# Altium PCB Copy of motherboard.PcbDoc
Units mil, origin at the board's own origin, x right, y up, seen from the top; angles counter-clockwise.
Board outline 6000 x 4000 mil, 2 copper layers (Top Layer, Bottom Layer); 46 components, 53 nets, 321 pads, 95 vias.
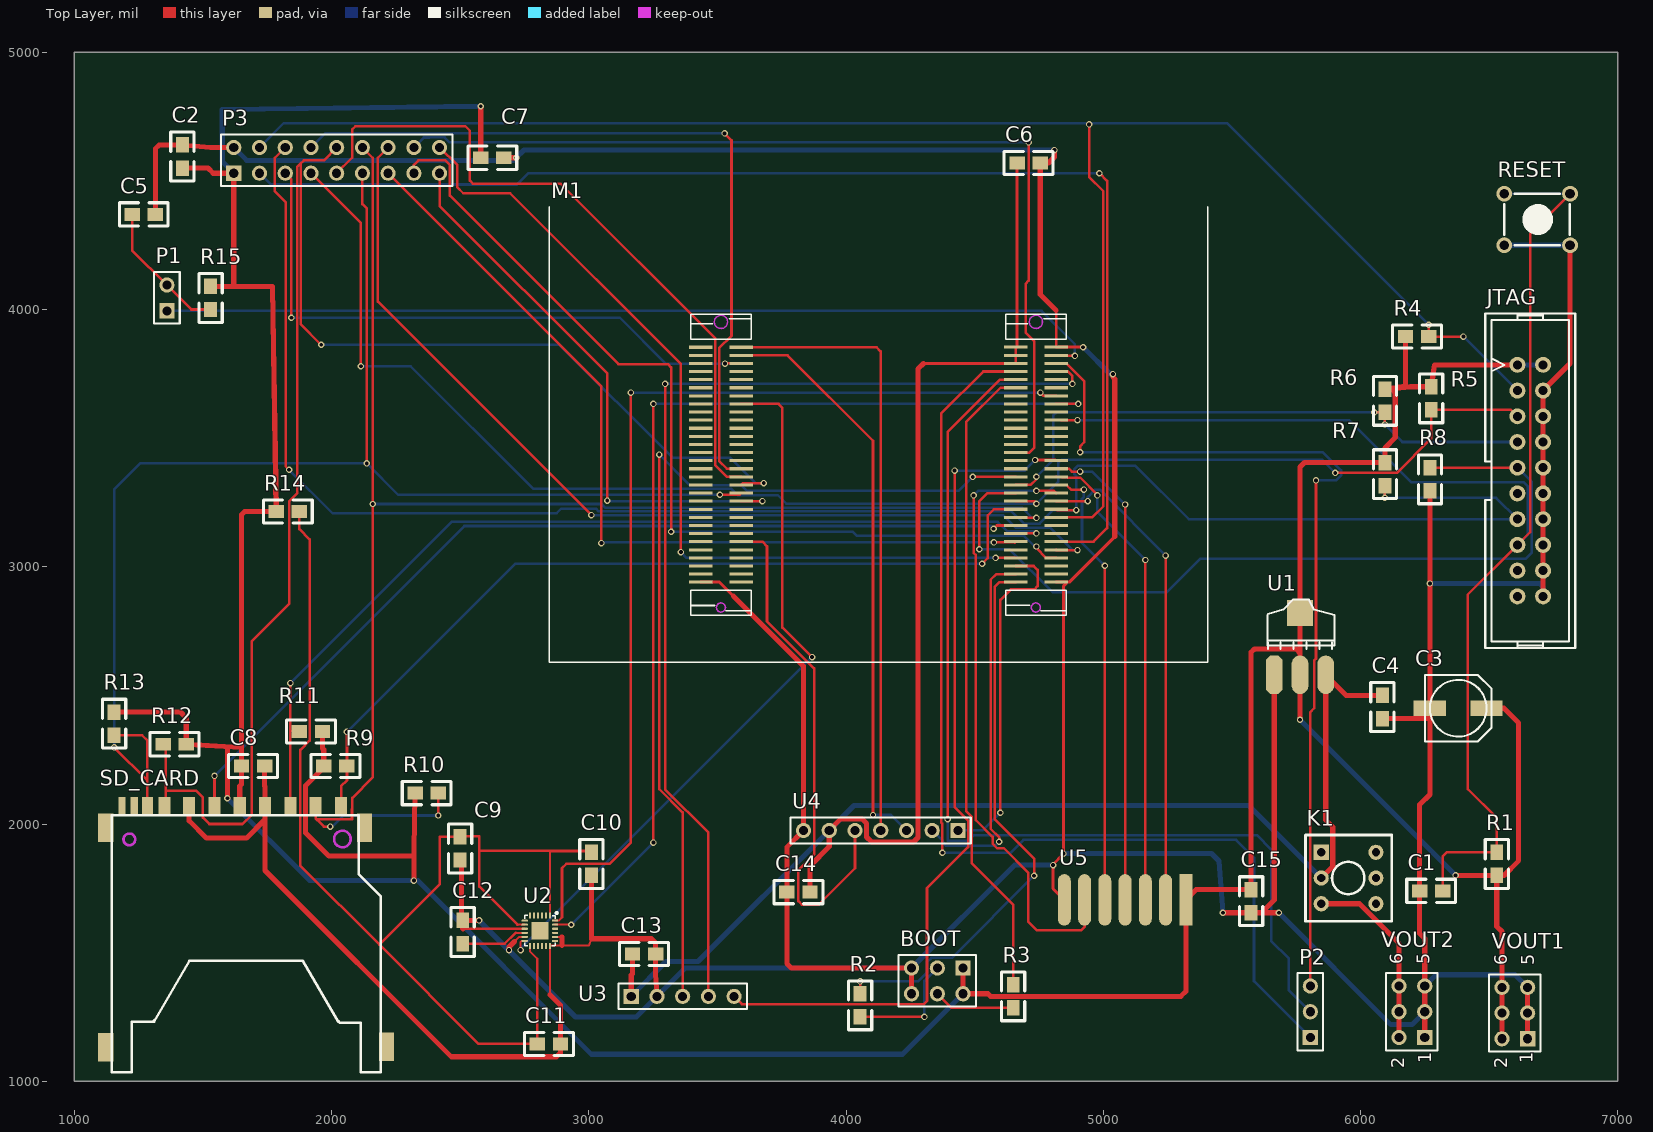
[diagram p0: Top Layer view]
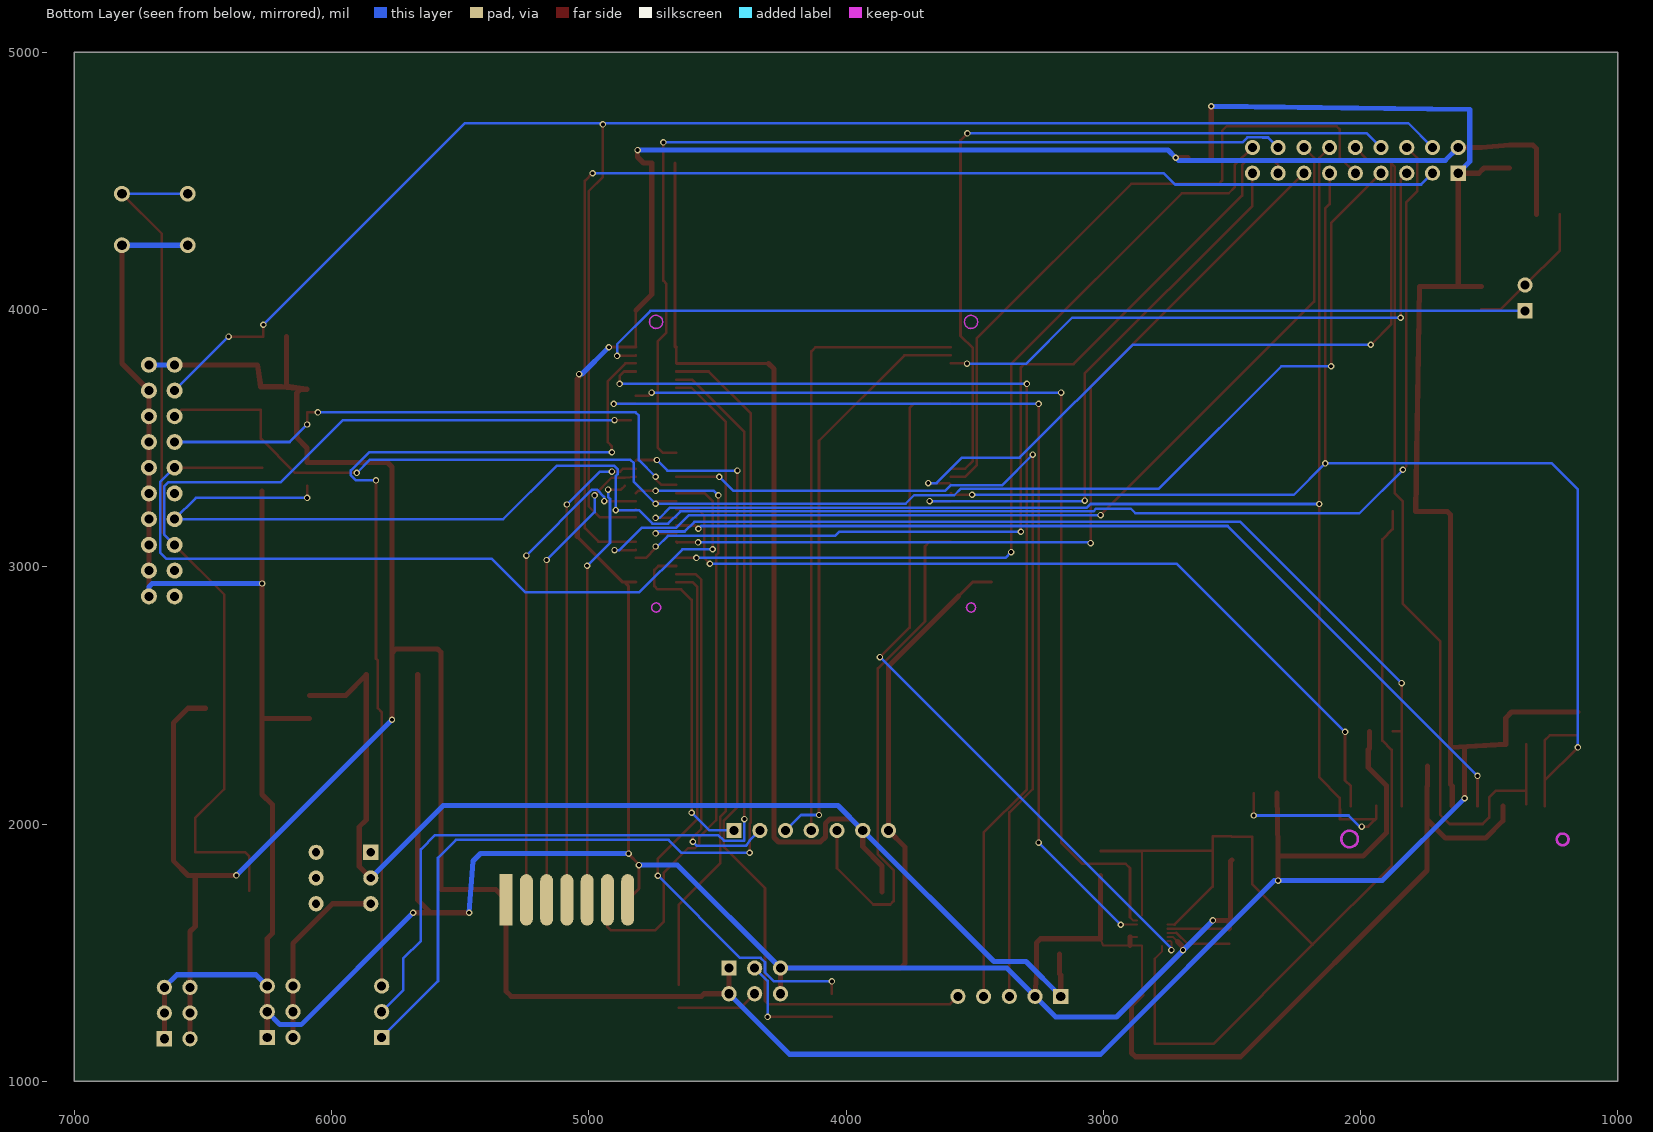
[diagram p1: Bottom Layer view, seen from below]

## Layer stack, top to bottom
Top Solder: solder mask 0.4, Solder Resist, Dk 3.5
Top Layer: signal copper 1.4
Dielectric 1: dielectric 12.6, FR-4, Dk 4.8
Bottom Layer: signal copper 1.4
Bottom Solder: solder mask 0.4, Solder Resist, Dk 3.5

## Board outline
1000,1000 7000,1000 7000,5000 1000,5000

## Design rules (kind name [scope] priority, off if disabled: settings)
Clearance Clearance_1 [All] p1: gap=5 ignorepadtopadclearanceinfootprint=TRUE except(0: Arc-Hole Track-Hole SMDPad-Hole THPad-Hole Via-Hole Fill-Hole Poly-Hole Region-Hole Text-Hole; 2: SMDPad-SMDPad)
Clearance [InNet('GND') vs InNet('VCC5')] p2: gap=10 ignorepadtopadclearanceinfootprint=TRUE
ComponentClearance [All] p1: gap=6 collisioncheckmode=3 verticalgap=10 showdistances=FALSE
HoleToHoleClearance [All] p1: gap=0 allowstackedmicrovias=TRUE
MinimumSolderMaskSliver all [All] p1: minsoldermaskwidth=10
MinimumSolderMaskSliver imu [HasFootprint('QFN24-t') vs HasFootprint('No Footprint')] p2: minsoldermaskwidth=0
ParallelSegment dcmi [InNetClass('dcmi') vs InNetClass('dcmi')] p1: limit=10000 gap=10
ParallelSegment sdio [InNetClass('sdio') vs InNetClass('sdio')] p2: limit=10000 gap=10
ParallelSegment spi [InNetClass('spi') vs InNetClass('spi')] p3: limit=10000 gap=10
PolygonConnect [All] p1: connectstyle=Relief reliefconductorwidth=10 reliefentries=4 polygonreliefangle="90 Angle" airgapwidth=10
RoutingVias [All] p1: holewidth=15 width=25 viastyle="Through Hole" minholewidth=15 minwidth=25 maxholewidth=15 maxwidth=25
SMDNeckDown [All] p1: percent=100.000
SilkToSilkClearance [All] p1: silktosilkclearance=0
SilkToSolderMaskClearance imu_silk_to_solder [IsPad vs HasFootprint('QFN24-t')] p1: minsilkscreentomaskgap=0 clearancetoexposedcopper=TRUE
SilkToSolderMaskClearance "all silk to solder" [IsPad] p2: minsilkscreentomaskgap=6 clearancetoexposedcopper=TRUE
SolderMaskExpansion [All] p1: expansion=4
Width vcc5 [InNet('VCC5')] p1: maxlimit=20 minlimit=10 preferedwidth=20 minimp=50.000000 maximp=50.000000 favimp=50.000000
Width gnd [InNet('GND')] p2: maxlimit=20 minlimit=7 preferedwidth=20 minimp=50.000000 maximp=50.000000 favimp=50.000000
Width vcc3 [InNet('VCC3.3')] p3: maxlimit=20 minlimit=10 preferedwidth=20 minimp=50.000000 maximp=50.000000 favimp=50.000000
Width vbtn [InNet('VBTN')] p4: maxlimit=20 minlimit=20 preferedwidth=20 minimp=50.000000 maximp=50.000000 favimp=50.000000
Width [All] p5: maxlimit=20 minlimit=7 preferedwidth=10 minimp=50.000000 maximp=50.000000 favimp=50.000000
25 further rules are at their usual default settings.

## Classes and differential pairs
net class spi: SPI_MISO SPI_MOSI SPI_NCS SPI_SCK
net class dcmi: DCMI_D0 DCMI_D1 DCMI_D2 DCMI_D3 DCMI_D4 DCMI_D5 DCMI_D6 DCMI_D7 DCMI_PCLK DCMI_PWDN DCMI_SCL DCMI_SDA DCMI_VSYNC DCMI_XCLK
net class sdio: SDIO_CMD SDIO_D2 SDIO_SCK
component class infra&stlink: BOOT C1 C2 C3 C4 C5 C6 C7 C8 C9 C10 C11 C12 C13 C14 C15 JTAG K1 P1 P2 P3 R1 R2 R3 R4 R5 R6 R7 R8 R9 R10 R11 R12 R13 R14 R15 RESET SD_CARD U1 U3 U4 VOUT1 VOUT2

## Components (designator, comment, footprint, x,y, rotation, side; value= is the part's Value field where it differs from the comment)
BOOT "BOOT" HDR2X3 4455,1440 r180 top
C1 "104" 0805 6320,1740 r180 top
C2 "104" 0805 1420.06,4640 r270 top
C3 "220uF" CC6.56.5 6380,2450 r180 top
C4 "104" 0805 6085.06,2500 r270 top
C5 "6pF" 0805 1315,4370 r180 top
C6 "104" 0805 4755,4569.94 r180 top
C7 "104" 0805 2580,4590.06 r0 top
C8 "104" 0805 1740,2224.94 r180 top
C9 "104" 0805 2499.94,1860 r90 top
C10 "104" 0805 3009.94,1800 r90 top
C11 "104" 0805 2890,1145 r180 top
C12 "104" 0805 2510,1625 r270 top
C13 "104" 0805 3260,1494.94 r180 top
C14 "104" 0805 3770,1735.06 r0 top
C15 "104" 0805 5575.06,1745 r270 top
JTAG "JTAG" JTAG_20 6660,3335 r270 top
K1 "BUTTON" BTN8.5*8.5 5847.4,1890 r0 top
M1 "STM32F4&F7_CB" STM32F4&F7_CB 4817,3853.46 r180 top
P1 "VREF_SEL" HDR1X2 1360,3995 r90 top
P2 "PWM" HDR1X3 5805,1170 r90 top
P3 "OV5640" HDR2X9 1620,4530 r0 top
R1 "0R" 0805 6530,1890 r270 top
R2 "10K" 0805 4055.06,1340 r270 top
R3 "10K" 0805 4649.94,1285 r90 top
R4 "10K" 0805 6175,3895.06 r0 top
R5 "10K" 0805 6275.06,3700 r270 top
R6 "10K" 0805 6095,3690 r270 top
R7 "10K" 0805 6095.06,3405 r270 top
R8 "10K" 0805 6269.94,3295 r90 top
R9 "47K" 0805 2060,2224.94 r180 top
R10 "47K" 0805 2415,2119.94 r180 top
R11 "47K" 0805 1875,2360 r0 top
R12 "47K" 0805 1345,2310.06 r0 top
R13 "47K" 0805 1154.94,2345 r90 top
R14 "10R" 0805 1875,3215 r180 top
R15 "10R" 0805 1530,4000 r90 top
RESET "KEY_M" KEY_M 6559.09,4450 r0 top
SD_CARD "sd card" SDCARD_L 1938,2070 r0 top
U1 "AMS1117-3.3" AMS1117 5664.97,2580.06 r0 top
U2 "MPU9250" QFN24-t 2849.5,1644 r270 top
U3 "GPS" HDR1X5 3165,1330 r0 top
U4 "AS61-T17" HDR1X7 4435,1975 r180 top
U5 "NA" "Edge Connector7" 5321.22,1705 r180 top
VOUT1 "VCC3.3" HDR2X3 6650,1165 r90 top
VOUT2 "VCC5" HDR2X3 6250,1170 r90 top

## Footprints (in the part's own frame and the unit in brackets; to place one, negate y for a bottom-side part, rotate by r counter-clockwise, add the part's x,y. Pads: shape width x height; smd on the part's side, far side on the other; paste and mask are expansions set on the pad)
0805 [mil]
  rect 60x50 smd: 1(0,-0.06) 2(90,-0.06)
  silkscreen extent -50,-45 140,45
AMS1117 [mil]
  oct 65x150 smd: 1(0.03,-0.06)
  oval 65x150 smd: 2(100.03,-0.06) 3(200.03,-0.06)
  rect 100x100 smd: 4(100.03,239.94)
  silkscreen extent -26,100 234,293
BTN8.5*8.5 [mm]
  rect 1.5x1.5 hole 0.8: 1(0,0)
  round 1.5 hole 0.8: 2(0,-2.54) 3(0,-5.08) 4(5.4,-5.08) 5(5.4,-2.54) 6(5.4,0)
  silkscreen extent -1.55,-6.79 6.95,1.71
CC6.56.5 [mm]
  rect 3.2x1.5 smd: 1(-2.794,0) 2(2.8,0)
  silkscreen extent -3.3,-3.3 3.3,3.3
"Edge Connector7" [mm]
  rect 1.27x5.08 smd: 1(0,0)
  oval 1.27x5.08 smd: 2(2,0) 3(4,0) 4(6,0) 5(8,0) 6(10,0) 7(12,0)
  rect 1.27x5.08 smd far side: B1(0,0)
  oval 1.27x5.08 smd far side: B2(2,0) B3(4,0) B4(6,0) B5(8,0) B6(10,0) B7(12,0)
HDR1X2 [mm]
  rect 1.5x1.5 hole 0.9: 1(0,0)
  round 1.5 hole 0.9: 2(2.54,0)
  silkscreen extent -1.27,-1.27 3.81,1.27
HDR1X3 [mm] "Connector; Header; 3 Position"
  rect 1.5x1.5 hole 0.9: 1(0,0)
  round 1.5 hole 0.9: 2(2.54,0) 3(5.08,0)
  silkscreen extent -1.27,-1.27 6.35,1.27
HDR1X5 [mm] "Connector; Header; 5 Position"
  rect 1.5x1.5 hole 0.9: 1(0,0)
  round 1.5 hole 0.9: 2(2.54,0) 3(5.08,0) 4(7.62,0) 5(10.16,0)
  silkscreen extent -1.27,-1.27 11.43,1.27
HDR1X7 [mm] "Connector; Header; 7 Position"
  rect 1.5x1.5 hole 0.9: 1(0,0)
  round 1.5 hole 0.9: 2(2.54,0) 3(5.08,0) 4(7.62,0) 5(10.16,0) 6(12.7,0) 7(15.24,0)
  silkscreen extent -1.27,-1.27 16.51,1.27
HDR2X3 [mm]
  rect 1.5x1.5 hole 0.9: 1(0,0)
  round 1.5 hole 0.9: 2(0,2.54) 3(2.54,0) 4(2.54,2.54) 5(5.08,0) 6(5.08,2.54)
  silkscreen extent -1.27,-1.27 6.35,3.81
HDR2X9 [mm]
  rect 1.5x1.5 hole 0.9: 1(0,0)
  round 1.5 hole 0.9: 2(0,2.54) 3(2.54,0) 4(2.54,2.54) 5(5.08,0) 6(5.08,2.54) 7(7.62,0) 8(7.62,2.54) 9(10.16,0) 10(10.16,2.54) 11(12.7,0) 12(12.7,2.54) 13(15.24,0) 14(15.24,2.54) 15(17.78,0) 16(17.78,2.54) 17(20.32,0) 18(20.32,2.54)
  silkscreen extent -1.27,-1.27 21.59,3.81
JTAG_20 [mil]
  round 62 hole 35: 1(-450,-50) 2(-450,50) 3(-350,-50) 4(-350,50) 5(-250,-50) 6(-250,50) 7(-150,-50) 8(-150,50) 9(-50,-50) 10(-50,50) 11(50,-50) 12(50,50) 13(150,-50) 14(150,50) 15(250,-50) 16(250,50) 17(350,-50) 18(350,50) 19(450,-50) 20(450,50)
  silkscreen extent -650,-175 650,175
KEY_M [mil]
  round 62 hole 38: 1(0,0) 1(255.91,0) 2(0,-200) 2(255.91,-200)
  silkscreen extent 0,-200 255,0
QFN24-t [mm]
  rrect50% 0.6x0.2 smd: 1(0,0) 2(0,-0.4) 3(0,-0.8) 4(0,-1.2) 5(0,-1.6) 6(0,-2) 13(3,-2) 14(3,-1.6) 15(3,-1.2) 16(3,-0.8) 17(3,-0.4) 18(3,0)
  rrect50% 0.2x0.6 smd: 7(0.5,-2.5) 8(0.9,-2.5) 9(1.3,-2.5) 10(1.7,-2.5) 11(2.1,-2.5) 12(2.5,-2.5) 19(2.5,0.5) 20(2.1,0.5) 21(1.7,0.5) 22(1.3,0.5) 23(0.9,0.5) 24(0.5,0.5)
  rect 1.7x1.7 smd: 25(1.499,-1.003)
  silkscreen extent -0.36,-2.5 3,0.76
SDCARD_L [mm]
  rect 1.2x1.8 smd: 1(0,0) 2(-2.489,0) 3(-4.983,-0.009) 4(-7.483,-0.009) 5(-9.983,-0.009) 6(-12.483,-0.009) 7(-14.908,-0.009) 9(2.517,-0.009)
  rect 1.1x1.8 smd: 8(-16.612,0)
  rect 0.7x1.8 smd: 10(-17.908,-0.009) 12(-19.101,0)
  rect 1.5x2.8 smd: 11(-20.726,-23.834) 11(-20.726,-2.143) 11(4.826,-2.143) 11(7.01,-23.784)
  Keep-Out Layer circle w0.254: c-18.39,-3.3 r0.58
  Keep-Out Layer circle w0.254: c2.642,-3.26 r0.82
  silkscreen extent -20.13,-26.3 6.44,-0.9
STM32F4&F7_CB [mm]
  rect 2.3x0.3 smd: J1_1(0,0) J1_2(0,0.8) J1_3(0,1.6) J1_4(0,2.4) J1_5(0,3.2) J1_6(0,4) J1_7(0,4.8) J1_8(0,5.6) J1_9(0,6.4) J1_10(0,7.2) J1_11(0,8) J1_12(0,8.8) J1_13(0,9.6) J1_14(0,10.4) J1_15(0,11.2) J1_16(0,12) J1_17(0,12.8) J1_18(0,13.6) J1_19(0,14.4) J1_20(0,15.2) J1_21(0,16) J1_22(0,16.8) J1_23(0,17.6) J1_24(0,18.4) J1_25(0,19.2) J1_26(0,20) J1_27(0,20.8) J1_28(0,21.6) J1_29(0,22.4) J1_30(0,23.2) J1_31(4,23.2) J1_32(4,22.4) J1_33(4,21.6) J1_34(4,20.8) J1_35(4,20) J1_36(4,19.2) J1_37(4,18.4) J1_38(4,17.6) J1_39(4,16.8) J1_40(4,16) J1_41(4,15.2) J1_42(4,14.4) J1_43(4,13.6) J1_44(4,12.8) J1_45(4,12) J1_46(4,11.2) J1_47(4,10.4) J1_48(4,9.6) J1_49(4,8.8) J1_50(4,8) J1_51(4,7.2) J1_52(4,6.4) J1_53(4,5.6) J1_54(4,4.8) J1_55(4,4) J1_56(4,3.2) J1_57(4,2.4) J1_58(4,1.6) J1_59(4,0.8) J1_60(4,0) J2_1(31.1,0.001) J2_2(31.1,0.801) J2_3(31.1,1.601) J2_4(31.1,2.401) J2_5(31.1,3.201) J2_6(31.1,4.001) J2_7(31.1,4.801) J2_8(31.1,5.601) J2_9(31.1,6.401) J2_10(31.1,7.201) J2_11(31.1,8.001) J2_12(31.1,8.801) J2_13(31.1,9.601) J2_14(31.1,10.401) J2_15(31.1,11.201) J2_16(31.1,12.001) J2_17(31.1,12.801) J2_18(31.1,13.601) J2_19(31.1,14.401) J2_20(31.1,15.201) J2_21(31.1,16.001) J2_22(31.1,16.801) J2_23(31.1,17.601) J2_24(31.1,18.401) J2_25(31.1,19.201) J2_26(31.1,20.001) J2_27(31.1,20.801) J2_28(31.1,21.601) J2_29(31.1,22.401) J2_30(31.1,23.201) J2_31(35.1,23.201) J2_32(35.1,22.401) J2_33(35.1,21.601) J2_34(35.1,20.801) J2_35(35.1,20.001) J2_36(35.1,19.201) J2_37(35.1,18.401) J2_38(35.1,17.601) J2_39(35.1,16.801) J2_40(35.1,16.001) J2_41(35.1,15.201) J2_42(35.1,14.401) J2_43(35.1,13.601) J2_44(35.1,12.801) J2_45(35.1,12.001) J2_46(35.1,11.201) J2_47(35.1,10.401) J2_48(35.1,9.601) J2_49(35.1,8.801) J2_50(35.1,8.001) J2_51(35.1,7.201) J2_52(35.1,6.401) J2_53(35.1,5.601) J2_54(35.1,4.801) J2_55(35.1,4.001) J2_56(35.1,3.201) J2_57(35.1,2.401) J2_58(35.1,1.601) J2_59(35.1,0.801) J2_60(35.1,0.001)
  Keep-Out Layer circle w0.152: c33.1,25.701 r0.45
  Keep-Out Layer circle w0.152: c33.1,-2.499 r0.65
  Keep-Out Layer circle w0.152: c2,-2.5 r0.65
  Keep-Out Layer circle w0.152: c2,25.7 r0.45
  silkscreen extent -14.95,-13.87 50.05,31.13

## Part data
BOOT VOUT1 VOUT2: library part "Header 3X2", "Header, 3-Pin, Dual row"
  VOUT1 VOUT2: LatestRevisionDate=17-Jul-2002, LatestRevisionNote="Re-released for DXP Platform.", Publisher="Altium Limited"
C1 C2 C4 C5 C6 C7 C8 C9 C10 C11 C12 C13 C14 C15: library part C
C3: library part CAP
M1: "F429/746 Core Board"
P1: library part "Header 2", "Header, 2-Pin"
P2: library part "Header 3", "Header, 3-Pin", LatestRevisionDate=17-Jul-2002, LatestRevisionNote="Re-released for DXP Platform.", Publisher="Altium Limited"
P3: library part "Header 9X2", "Header, 9-Pin, Dual row"
R1 R2 R3 R4 R5 R6 R7 R8 R9 R10 R11 R12 R13 R14 R15: library part R
U1: library part AMS1117
U2: "9轴运动处理传感器"
U3: library part "Header 5", "Header, 5-Pin", LatestRevisionDate=17-Jul-2002, LatestRevisionNote="Re-released for DXP Platform.", Publisher="Altium Limited"
U4: library part "Header 7", "Header, 7-Pin", LatestRevisionDate=17-Jul-2002, LatestRevisionNote="Re-released for DXP Platform.", Publisher="Altium Limited"
U5: library part ESP8266SPI

## Via types
v1: diameter 25, hole 15, Top Layer to Bottom Layer, 95 vias

## Nets (pads, with @x,y where several pads share a name; then routed paths per layer and width w, separated by ;. In a path a pad name is that pad's centre, name@x,y a point inside that pad or via, vN(x,y) a via of type N, cw(c..) or ccw(c..) an arc to the next point about the centre after c; other vN are vias at no path point)
9D_INT: M1.J2_8 U2.12 | length 2840.6
  Top Layer w7.87: v1(2735,1510) 2735,1541.57 2739,1545.57 U2.12
  Top Layer w10: M1.J2_8@3592.48,3632.95 3737.5,3632.95 3753,3617.45 3753,2764 v1(3868,2649)
  Bottom Layer w7.87: v1(2735,1510) 2735,1516 v1@2739,1520
  Bottom Layer w10: v1@2739,1520 v1(3868,2649)
AS_AUX: M1.J2_25 U4.5 | length 2019.4
  Top Layer w10: M1.J2_25@3592.48,3097.52 3675,3097.52 3693,3079.52 3693,2788 3876,2605 3876,1882 3815,1821 3815,1700 3828,1687 3894,1687 4035,1828 U4.5
AS_MD0: M1.J1_33 U4.1 | length 1342.8
  Top Layer w10: v1(4600,2044) 4600,2871.5 4641,2912.5 4732.5,2912.5 4745,2925 4745,2987.5 4729.43,3003.07 M1.J1_33@4659.39,3003.07
  Bottom Layer w10: U4.1 4531,1975 v1(4600,2044)
AS_MD1: M1.J1_32 U4.2 | length 1432.3
  Top Layer w10: v1(4595,1931) 4595,1949 4562.5,1981.5 4562.5,2949.5 4584.57,2971.57 M1.J1_32@4659.39,2971.57
  Bottom Layer w10: U4.2 4375,1935 4387.5,1915 4579,1915 v1(4595,1931)
AS_RXD: M1.J2_2 U4.3 | length 2259.8
  Top Layer w10: M1.J2_2@3592.48,3821.93 3773,3821.93 4105,3489.93 v1(4105,2035)
  Bottom Layer w10: v1(4105,2035) 4175,2035 U4.3
AS_TXD: M1.J2_1 U4.4 | length 2411.6
  Top Layer w10: M1.J2_1@3592.48,3853.42 4119.08,3853.42 4135,3837.5 U4.4
BOOT0: M1.J1_31 R2.1 | length 2192.5
  Top Layer w10: R2.1 v1(4055,1388) ; M1.J1_31@4659.39,2940.08 4597.08,2940.08 4577.5,2920.5 4577.5,2019 4731,1865.5 v1(4731,1799)
  Bottom Layer w10: v1(4055,1388) 4280,1388 4315,1423 4315,1462.5 4332.03,1479.53 4411.53,1479.53 v1(4731,1799)
BOOT1: M1.J1_55 R3.2 | length 2510.7
  Top Layer w10: R3.2 4650,1686.53 4489.53,1847 4489.53,2028 4467,2050.53 4467,3562 4600.98,3695.98 M1.J1_55@4659.39,3695.98
DCMI_D0: M1.J2_16 P3.8 | length 3033.8
  Top Layer w10: v1(3528,4685) 3555,4658 3555,3898 3507,3850 3507,3410.98 3537,3380.98 M1.J2_16@3592.48,3380.98
  Bottom Layer w10: P3.8 1975,4685 v1(3528,4685)
DCMI_D1: M1.J2_17 P3.9 | length 2679.2
  Top Layer w10: P3.9 2080,4590 2080,4700 2092.5,4712.5 2520,4712.5 2537.5,4695 2537.5,4501.5 2550,4489 2891,4489 3491,3889 3491,3396 3537.51,3349.49 M1.J2_17@3592.48,3349.49
DCMI_D2: M1.J2_18 P3.10 R12.1 SD_CARD.7 | length 6223.5
  Top Layer w10: SD_CARD.7@1355,2076.07 R12.1@1355,2310 ; 1361.07,2130 1473,2130 1500,2103 1500,2025 1525,2000 1654,2000 1690,2036 1690,2711 1835,2856 1835,3254 1866.5,3285.5 1866.5,4553.5 1880,4567 ; v1(1960,3863) 1880,3943 1880,4567 ; P3.10 1970,4580 1893,4580 1880,4567 ; M1.J2_18@3592.48,3317.99 3599.49,3325 v1(3680,3325)
  Bottom Layer w10: v1(1960,3863) 2886,3863 3325,3424 3548.99,3424 3647.99,3325 v1(3680,3325)
DCMI_D3: M1.J2_19 P3.11 R13.1 SD_CARD.8 | length 5245.3
  Top Layer w10: v1(1155,2298) 1284,2169 ; R13.1 1264,2345 1284,2325 1284,2169 ; SD_CARD.8 1284,2169 ; P3.11 2120,4410 2137,4393 v1(2137,3402) ; v1(3510,3280) 3585.98,3280 M1.J2_19@3592.48,3286.5
  Bottom Layer w10: v1(1155,2298) 1155,3301 1256,3402 v1(2137,3402) 2259,3280 v1(3510,3280)
DCMI_D4: M1.J1_39 P3.12 R10.1 SD_CARD.1 | length 6130.4
  Top Layer w10: SD_CARD.1 1938,2022 1940.5,2019.5 ; 1938.04,2022 1940.5,2019.5 ; v1(1995,1990) 1970,1990 1944.63,2015.37 1944.57,2015.37 1940.5,2019.5 ; P3.12 2160,4590 v1(2160,3244) 2160,2181 2080.63,2101.63 2079.51,2018.47 1940.5,2019.5 ; v1(2415,2033) R10.1 ; M1.J1_39@4659.39,3192.05 4661.44,3190 v1(4740,3190)
  Bottom Layer w10: v1(1995,1990) 2003,1990 2046,2033 v1(2415,2033) ; v1(2160,3244) 3049.5,3244 3063.5,3230 4684.05,3230 4724.05,3190 v1(4740,3190)
DCMI_D5: M1.J1_36 P3.13 | length 3394.5
  Top Layer w10: P3.13 3049,3701 v1(3049,3092) ; v1(4575,3095) 4655.72,3095 4656.28,3094.44 M1.J1_36@4659.39,3097.56
  Bottom Layer w10: v1(3049,3092) 3052,3095 v1(4575,3095)
DCMI_D6: M1.J1_26 P3.14 | length 3819.3
  Top Layer w10: P3.14 2180,4590 2180,4031 v1(3010,3201) ; M1.J1_26@4816.87,3066.06 4817.94,3065 v1(4900,3065)
  Bottom Layer w10: v1(3010,3201) 3011,3200 4611.57,3200 4659.07,3152.5 4793.56,3152.5 4881.06,3065 v1(4900,3065)
DCMI_D7: M1.J1_27 P3.15 | length 3624.7
  Top Layer w10: P3.15 2320,4562.5 2337.5,4580 2442.5,4580 2460,4562.5 2460,4443 3115.5,3787.5 3307.5,3787.5 3320,3775 v1(3320,3136) ; v1(4740,3078.78) 4740,3072.57 4778,3034.57 M1.J1_27@4816.87,3034.57
  Bottom Layer w10: v1(3320,3136) 4027,3136 4043,3120 4692.57,3120 4733.78,3078.78 v1(4740,3078.78)
DCMI_HREF: M1.J2_3 P3.5 | length 2394.3
  Top Layer w10: P3.5 1844,4506 v1(1844,3968) ; v1(3529.57,3790) 3530,3790.43 M1.J2_3@3592.48,3790.43
  Bottom Layer w10: v1(1844,3968) 3121,3968 3299,3790 v1(3529.57,3790)
DCMI_PCLK: M1.J1_47 P3.16 | length 3699.9
  Top Layer w10: M1.J1_47@4659.39,3444.01 4712.51,3444.01 4731,3462.5 4731,3877 4698,3910 4698,4100 4710,4112 v1(4710,4650)
  Bottom Layer w10: P3.16 2358.76,4668.76 2380.26,4668.76 2381.03,4669.53 2439.47,4669.53 2459,4650 v1(4710,4650)
DCMI_PWDN: M1.J1_34 P3.18 | length 3378.8
  Top Layer w10: P3.18 2489,4561 2489,4475 2512,4452 2694,4452 3358,3788 v1(3358,3057) ; v1(4581.43,3034.57) M1.J1_34@4659.39,3034.57
  Bottom Layer w10: v1(3358,3057) 3380.43,3034.57 v1(4581.43,3034.57)
DCMI_RESET: JTAG.5 M1.J1_41 P3.7 R5.2 | length 5944.5
  Top Layer w10: P3.7 2114,4336 v1(2114,3779.5) ; M1.J1_41@4659.39,3255.04 4729.96,3255.04 v1(4740,3245) ; v1(5902,3365) 6142,3365 6275,3498 R5.2 6585,3610 JTAG.5
  Bottom Layer w10: v1(2114,3779.5) 2307.5,3779.5 2784.5,3302.5 3554.65,3302.5 3579.15,3278 3735,3278 3768,3245 v1(4740,3245) 4825,3330 4825,3402.5 4838,3415.5 5851.5,3415.5 v1(5902,3365)
DCMI_SCL: JTAG.3 M1.J1_22 P3.4 R4.2 | length 7092.2
  Top Layer w10: M1.J1_22@4816.87,3192.05 M1.J1_22 4957.05,3192.05 5000,3235 5000,4460 4945,4515 ; 4945,4518 v1(4945,4720) ; v1(6265,3941) R4.2 v1(6400,3895)
  Bottom Layer w10: P3.4 1814.29,4724.29 5481.71,4724.29 v1(6265,3941) ; v1(6400,3895) JTAG.3
DCMI_SDA: JTAG.13 M1.J1_21 P3.6 R7.2 | length 7128
  Top Layer w10: P3.6 1780,4590 1780,4459 1821.23,4417.77 1821.23,3390.77 v1(1835,3377) ; M1.J1_21 4820.54,3220 v1(4895,3220) ; v1(6095,3268) R7.2
  Bottom Layer w10: v1(1835,3377) 2004,3208 2875,3208 2893,3226 3027.5,3226 3038.5,3215 4643.92,3215 4691.42,3167.5 4752.5,3167.5 4805,3220 v1(4895,3220) 4895,3353.18 4887.5,3360.68 4887.5,3379.32 4900.68,3392.5 5125,3392.5 5332.5,3185 JTAG.13 6527,3268 v1(6095,3268)
DCMI_VSYNC: M1.J1_25 P3.3 | length 4913.7
  Top Layer w10: M1.J1_25@4816.87,3097.56 M1.J1_25 4962.56,3097.56 5015,3150 5015,3324.57 5015,4500 v1(4985,4530)
  Bottom Layer w10: P3.3 1764,4486 2721,4486 2765,4530 v1(4985,4530)
DCMI_XCLK: M1.J2_20 P3.17 | length 2229.4
  Top Layer w10: P3.17 2420,4403 3072,3751 v1(3072,3257) ; M1.J2_20@3592.48,3255 v1(3675,3255)
  Bottom Layer w10: v1(3072,3257) 3074,3255 v1(3675,3255)
GND: BOOT.5 BOOT.6 C1.2 C2.1 C3.2 C4.2 C5.1 C6.1 C7.2 C8.1 C9.1 C10.1 C11.1 C12.1 C13.1 C14.1 C15.2 JTAG.4 JTAG.6 JTAG.8 JTAG.10 JTAG.12 JTAG.14 JTAG.16 JTAG.18 JTAG.20 M1.J1_1 M1.J1_30 M1.J2_31 P3.2 R8.1 RESET.2 SD_CARD.3 SD_CARD.6 U1.1 U2.9 U2.11 U2.18 U2.20 U3.2 U4.7 U5.7 VOUT1.1 VOUT1.3 VOUT1.5 VOUT2.1 VOUT2.3 VOUT2.5 | length 24771.8
  Top Layer w7.87: 2511.75,1592.82 U2.9 ; 2711,1543 2729.32,1561.32 U2.11 ; 2849.5,1336 U2.18 2849.5,1527 2896,1527 3001,1527 3010,1554 ; U2.20 2895,1561.32
  Top Layer w10: M1.J1_1 4817,3996
  Top Layer w11.81: M1.J2_31@3435,2940.04 M1.J2_31 3508,2940.04 3562,2886.04 ; M1.J1_30@4816.87,2940.08 M1.J1_30 M1.J1_30@4848.78,2940.08 ; M1.J1_1@4816.87,3853.46 M1.J1_1 v1(4922,3853.46) ; U5.7 4805,1748.78 v1(4805,1840) 4805,1842.5 4845,1882.5 v1(4845,1885) 4845,2923.86 4855,2933.86 M1.J1_30@4848.78,2940.08 ; 5045,3117.08 4868,2940.08 M1.J1_30@4848.78,2940.08
  Top Layer w20: C5.1 1315,4625 1330,4640 C2.1 1530,4630 P3.2 ; SD_CARD.6 1446.54,2012.28 1513.82,1945 1668.99,1945 1741.82,2017.83 ; C8.1 1740,2147.82 1741.82,2146 SD_CARD.3 1741.82,2017.83 ; C9.1 2504.97,1855.03 2504.97,1629.97 C12.1 ; 2511.75,1592.82 2509.94,1594.63 C12.1 ; v1(2573.5,1625) C12.1 ; C7.2 v1(2718,4590) ; v1(2690,1510) 2690,1522 2711,1543 ; 2849.5,1336 2890,1295.5 C11.1 2890,1110 2875,1095 2465.82,1095 1741.82,1819 1741.82,2017.83 ; 2895,1561.32 2896,1560.32 2896,1527 ; C10.1 3010,1554 3243.5,1554 3260,1537.5 C13.1 3260,1418 U3.2 ; 3562,2886.04 3835,2613.04 U4.7 3770,1910 C14.1 3770,1457.5 3787.5,1440 BOOT.5 BOOT.6 ; v1(4810,4620) 4810,4592.5 4787.5,4570 C6.1 4755,4058 4817,3996 ; v1(5037.5,3749.21) 5037.5,3737.96 5045,3730.46 5045,3117.08 ; v1(5465,1655) C15.2 5615,1655 ; U1.1 5665,1705 5615,1655 ; v1(5683,1655) 5615,1655 ; C4.2 6269.76,2411 ; VOUT2.1 VOUT2.3 VOUT2.5 6250,1555 6230,1575 C1.2 6230,2075 6269.76,2114.76 6269.76,2411 ; v1(6269.76,2935) C3.2 ; R8.1 6270,2872.47 C3.2 ; VOUT1.1 VOUT1.3 VOUT1.5 ; JTAG.20 JTAG.18 JTAG.16 JTAG.14 JTAG.12 JTAG.10 JTAG.8 JTAG.6 JTAG.4 6815,3790 RESET.2@6815,4250 ; 6269.76,2411 C3.2
  Bottom Layer w20: P3.2 1670,4580 2708,4580 v1(2718,4590) 2748,4620 v1(4810,4620) ; v1(2573.5,1625) v1@2690,1508.5 ; v1(2690,1510) v1@2690,1508.5 ; v1(4805,1840) 4655,1840 BOOT.5 3375,1440 U3.2 3185,1250 2948.5,1250 v1@2690,1508.5 ; v1(4845,1885) 5421,1885 5450,1856 v1(5465,1655) ; v1(4922,3853.46) 5026.25,3749.21 v1(5037.5,3749.21) ; v1(5683,1655) 6118,1220 6200,1220 VOUT2.3 ; VOUT2.5 6294,1414 6601,1414 VOUT1.5 ; v1(6269.76,2935) 6697,2935 6710,2922 JTAG.20 ; RESET.2@6559.09,4250 RESET.2@6815,4250
GPS_PPS: M1.J1_15 U3.5 | length 3329.8
  Top Layer w10: U3.5 3595,1300 4302.5,1300 4315,1312.5 4315,1751 4474.53,1910.53 4474.53,2013 4422,2065.53 v1(4422,3374) ; v1(4735,3415) 4814.39,3415 M1.J1_15@4816.87,3412.52
  Bottom Layer w10: v1(4422,3374) 4694,3374 v1(4735,3415)
GPS_RXD: M1.J1_4 U3.4 | length 4134.4
  Top Layer w10: v1(3297,3711) 3297,2135 3465,1967 U3.4 ; M1.J1_4@4816.87,3758.98 4862.5,3758.98 4880,3741.48 v1(4880,3711)
  Bottom Layer w10: v1(3297,3711) v1(4880,3711)
GPS_TXD: M1.J1_44 U3.3 | length 3610.1
  Top Layer w10: v1(3274,3436) 3274,2136 3365,2045 U3.3 ; v1(4492.53,3349.53) M1.J1_44@4659.39,3349.53
  Bottom Layer w10: v1(3274,3436) 3392.5,3317.5 3592.55,3317.5 3615.05,3295 4438,3295 v1(4492.53,3349.53)
IIC_SCL: M1.J1_8 U2.23 | length 3957.5
  Top Layer w7.87: U2.23 v1(2932,1608.57)
  Top Layer w10: v1(3251,1927.57) v1(3251,3632.99) ; M1.J1_8@4816.87,3632.99 v1(4903,3632.99)
  Bottom Layer w10: v1(2932,1608.57) v1(3251,1927.57) ; v1(3251,3632.99) v1(4903,3632.99)
IIC_SDA: M1.J1_7 U2.24 | length 3939.5
  Top Layer w7.87: U2.24 2882.82,1624.32 2896,1637.5
  Top Layer w10: 2896,1637.5 2896,1828.5 2912.5,1845 3081,1845 3164,1928 v1(3164,3677) ; v1(4755.98,3677) 4768.49,3664.49 M1.J1_7@4816.87,3664.49
  Bottom Layer w10: v1(3164,3677) v1(4755.98,3677)
JTCK: JTAG.9 M1.J1_42 R8.2 | length 3314
  Top Layer w10: v1(4518.5,3068) 4518.5,3255.03 4550,3286.53 M1.J1_42@4659.39,3286.53 ; R8.2 JTAG.9
  Bottom Layer w10: v1(4518.5,3068) 4636,3068 4803,2901 5247,2901 5377,3031 6641,3031 6666,3056 6666,3329 JTAG.9
JTMS: JTAG.7 M1.J1_43 R6.2 | length 2249.3
  Top Layer w10: M1.J1_43@4659.39,3318.03 4717.77,3318.03 4740,3340.26 v1(4740,3350) ; v1(6053,3600) R6.2 6094.94,3553.06 v1(6095,3553)
  Bottom Layer w10: v1(4740,3350) 4805,3415 4805,3587.5 4817.5,3600 v1(6053,3600) ; v1(6095,3553) 6163,3485 JTAG.7
NetBOOT_3: BOOT.3 R2.2 | length 460.7
  Top Layer w10: R2.2 v1(4305,1250)
  Bottom Layer w10: v1(4305,1250) 4305,1390 BOOT.3
NetBOOT_4: BOOT.4 R3.1 | length 317.8
  Top Layer w10: BOOT.4 4410,1285 R3.1
NetC5_2: C5.2 P1.2 R15.1 | length 540.4
  Top Layer w10: C5.2 1225,4230 P1.2 1455,4000 R15.1
NetC9_2: C9.2 C10.2 C11.2 R14.1 U2.1 U2.8 U2.13 | length 4802.4
  Top Layer w7.87: 2723,1608.57 U2.8 ; U2.13 2770.76,1505.24 2800,1476 ; U2.1 2849.5,1895 2849.5,1895.97
  Top Layer w10: R14.1 1875,3146 1915,3106 1915,2324 1879,2288 1879,1837.5 2185.75,1530.75 ; 2723,1608.57 2575,1756.57 2575,1895.97 ; 2800,1476 C11.2 2571.44,1145.06 2185.75,1530.75 ; 2849.5,1895 C10.2@3010,1895 ; 2849.5,1895.97 2575,1895.97 ; 2185.75,1530.75 2420,1765 2420,1950 C9.2 2502.5,1952.5 2575,1952.5 2575,1895.97
NetC12_2: C12.2 U2.10 | length 258.6
  Top Layer w7.87: 2715.46,1577.07 U2.10
  Top Layer w10: C12.2 2673.39,1535 2715.46,1577.07
PWM1: M1.J1_57 P2.1 | length 4116.1
  Top Layer w10: v1(4374.53,1888) 4374.53,2001.37 4370,2005.9 4370,3594.98 4534,3758.98 M1.J1_57@4659.39,3758.98
  Bottom Layer w10: v1(4374.53,1888) 4640,1888 4690,1938 5516,1938 5586,1868 5586,1389 P2.1
PWM2: M1.J1_56 P2.2 | length 3921.6
  Top Layer w10: v1(4395,2018.87) 4395,3524.48 4598,3727.48 M1.J1_56@4659.39,3727.48
  Bottom Layer w10: v1(4395,2018.87) 4395,1936 4396,1935 4475,1935 4497,1957 5597,1957 5653,1901 5653,1546 5721.55,1477.45 5721.55,1353.45 P2.2
PWM3: M1.J1_3 P2.3 | length 3564.3
  Top Layer w10: M1.J1_3@4816.87,3790.47 4857.53,3790.47 4926,3722 4926,3484 4910,3468 v1(4910,3445) ; P2.3 5805,2435 5820,2450 5820,2636 5827,2643 v1(5827,3336)
  Bottom Layer w10: v1(4910,3445) 5853.82,3445 5924.5,3374.32 5924.5,3355.68 5904.82,3336 v1(5827,3336)
RESET: C1.1 JTAG.15 M1.J1_10 R1.1 RESET.1 | length 5543.9
  Top Layer w10: M1.J1_10@4836.87,3570 v1(4900,3570) ; C1.1 6320,1875 6335,1890 R1.1 6529.94,2023 6417,2135.94 6417,2892 JTAG.15 6660,3135 6660,4295 RESET.1@6815,4450
  Bottom Layer w10: v1(4900,3570) 5956,3570 6198,3328 6635.5,3328 6651,3312.5 6651,3126 JTAG.15 ; RESET.1@6559.09,4450 RESET.1@6815,4450
SDIO_CMD: M1.J1_37 R11.1 SD_CARD.2 | length 3772.4
  Top Layer w10: SD_CARD.2 1840,2358.94 ; v1(1840,2548) 1840,2358.94 ; R11.1 1841,2359.94 1840,2358.94 ; M1.J1_37@4659.39,3129.05 4660.34,3130 v1(4740,3130)
  Bottom Layer w10: v1(1840,2548) 2466.55,3174.55 4589.45,3174.55 4627,3137 4733,3137 v1(4740,3130)
SDIO_D2: M1.J1_40 R9.1 SD_CARD.9 | length 3353.3
  Top Layer w10: SD_CARD.9 2037.09,2147 2060,2169.91 R9.1 v1(2060,2358) ; v1(4529,3011.5) 4551,3033.5 4551,3200 4574.54,3223.54 M1.J1_40@4659.39,3223.54
  Bottom Layer w10: v1(2060,2358) 2713.5,3011.5 v1(4529,3011.5)
SDIO_SCK: M1.J1_38 SD_CARD.5 | length 3643.7
  Top Layer w10: SD_CARD.5 v1(1544.97,2187) ; v1(4574,3148.05) 4586.5,3160.55 M1.J1_38@4659.39,3160.55
  Bottom Layer w10: v1(1544.97,2187) 2516.51,3158.54 4563.51,3158.54 v1(4574,3148.05)
SPI_MISO: M1.J1_17 U5.3 | length 1839.8
  Top Layer w10: M1.J1_17@4816.87,3349.53 M1.J1_17 4861.03,3346 4910.82,3346 4977.5,3279.32 v1(4977.5,3277.5) ; U5.3 v1(5163.74,3026.26)
  Bottom Layer w10: v1(4977.5,3277.5) 4977.5,3212.5 v1(5163.74,3026.26)
SPI_MOSI: M1.J1_16 U5.4 | length 1862.7
  Top Layer w10: M1.J1_16@4816.87,3381.02 4867.48,3381.02 4878.5,3370 v1(4910,3370) ; U5.4 v1(5085,3242)
  Bottom Layer w10: v1(4910,3370) 4957,3370 v1(5085,3242)
SPI_NCS: M1.J1_18 U5.5 | length 1706.1
  Top Layer w10: M1.J1_18@4860,3315 4875,3300 v1(4925,3300) ; U5.5 v1(5006.26,3003.74)
  Bottom Layer w10: v1(4925,3300) 4925,3271.82 4917.5,3264.32 4917.5,3092.5 v1(5006.26,3003.74)
SPI_RESET: M1.J1_19 U5.6 | length 2434.9
  Top Layer w10: v1(4496,3277.5) 4496,3054.03 4504.53,3045.5 4504.53,2014.53 4569.73,1949.33 4569.73,1923.49 4587.5,1905.72 4613.34,1905.72 4708.41,1810.64 4708.41,1620.09 4741,1587.5 4915.02,1587.5 4927.52,1600 U5.6 ; v1(4740,3295) 4808.41,3295 M1.J1_19@4816.87,3286.53
  Bottom Layer w10: v1(4496,3277.5) 4513.5,3295 v1(4740,3295)
SPI_SCK: M1.J1_20 U5.2 | length 1899.4
  Top Layer w10: M1.J1_20@4816.87,3255.04 4816.91,3255 v1(4940,3255) ; U5.2 v1(5242.48,3043.52)
  Bottom Layer w10: v1(4940,3255) 4940,3271.82 4968.18,3300 4986.82,3300 5242.48,3044.34 v1(5242.48,3043.52)
VBTN: K1.3 VOUT2.2 VOUT2.4 VOUT2.6 | length 732.4
  Top Layer w20: K1.3 5996,1690 6150,1536 VOUT2.6 VOUT2.4 VOUT2.2
VCC3.3: BOOT.1 BOOT.2 C2.2 C3.1 C7.1 C8.2 C15.1 JTAG.1 JTAG.2 P3.1 R1.2 R4.1 R5.1 R6.1 R7.1 R9.2 R10.2 R11.2 R12.2 R13.2 R14.2 R15.2 SD_CARD.4 U1.2 U1.4 U5.1 VOUT1.2 VOUT1.4 VOUT1.6 | length 17690.7
  Top Layer w20: R13.2 1412.5,2435 1435,2412.5 R12.2 1583.64,2301.36 1650,2297.5 ; C2.2 1520,4550 1540,4530 P3.1 1620,4090 ; R15.2 1620,4090 ; v1(1595,2100) 1595,2290 ; SD_CARD.4 1643.39,2148 1650,2154.61 C8.2 1650,2297.5 ; R11.2 1965,2294 1970,2289 R9.2 1970,2220 1899,2149 1899,1966 1990,1875 2320,1875 ; v1(2320,1780) 2320,1875 ; 2320,1895 2320,1875 ; 2320,1900 R10.2 ; C7.1 v1(2580,4790) ; BOOT.1 BOOT.2 4552,1340 4562,1330 5301.22,1330 5321.22,1350 U5.1 5361.22,1745 C15.1 5575,2667.5 5587.5,2680 5750,2680 5765,2665 ; v1(5765,2405) U1.2 5765,2665 ; R4.1 6175,3702.5 R6.1 ; v1(6370,1800) R1.2 ; C3.1 6557.5,2450 6615,2392.5 6615,1857.5 6557.5,1800 R1.2 ; VOUT1.2 VOUT1.4 VOUT1.6 6550,1582 6529.94,1602.06 R1.2 ; JTAG.1 6287.5,3785 R5.1 6195,3700 R6.1 ; 1620,4090 1770,4090 R14.2 1662.5,3215.06 1650,3202.56 1650,2297.5 ; 5765,2665 U1.4 5765,3387.5 5782.5,3405 R7.1 6095,3462 6135,3502 6135,3675 6120,3690 R6.1
  Bottom Layer w20: v1(1595,2100) 1915,1780 v1(2320,1780) 2335,1780 3010,1105 4220,1105 BOOT.2 ; P3.1 1575,4575 1575,4777.5 v1(2580,4790) ; v1(5765,2405) v1(6370,1800) ; JTAG.1 JTAG.2
VCC5: C4.1 C6.2 C13.2 C14.2 K1.2 M1.J1_58 M1.J1_59 M1.J1_60 U1.3 U3.1 U4.6 | length 8051.2
  Top Layer w10: M1.J1_58@4659.39,3790.47 4659.39,3821.97 M1.J1_60@4659.39,3853.46
  Top Layer w11.81: 4301,3790.47 M1.J1_58@4659.39,3790.47 ; M1.J1_60@4659.39,3853.46 4665,3853.46 C6.2
  Top Layer w20: U3.1 3165,1413 3170,1418 C13.2 ; C14.2 3860,1837 3935,1912 U4.6 3980,2020 4062.5,2020 4080,2002.5 4080,1950 4100,1930 4262.5,1930 4280,1947.5 4280,3769.47 4301,3790.47 ; K1.2 5892,1834.6 5892,1989 5865,2016 U1.3 5945,2500 C4.1
  Bottom Layer w20: U3.1 3300,1465 3425,1465 U4.6 4031.5,2071.5 5565.9,2071.5 K1.2
VREF+: M1.J1_2 P1.1 | length 3702.8
  Top Layer w10: M1.J1_2@4816.87,3821.97 4818.84,3820 v1(4890,3820)
  Bottom Layer w10: P1.1 4760,3995 4890,3865 v1(4890,3820)
pads on no net: JTAG.11 JTAG.17 JTAG.19 K1.1 K1.4 K1.5 K1.6 M1.J1_5 M1.J1_6 M1.J1_9 M1.J1_11 M1.J1_12 M1.J1_13 M1.J1_14 M1.J1_23 M1.J1_24 M1.J1_28 M1.J1_29 M1.J1_35 M1.J1_45 M1.J1_46 M1.J1_48 M1.J1_49 M1.J1_50 M1.J1_51 M1.J1_52 M1.J1_53 M1.J1_54 M1.J2_4 M1.J2_5 M1.J2_6 M1.J2_7 M1.J2_9 M1.J2_10 M1.J2_11 M1.J2_12 M1.J2_13 M1.J2_14 M1.J2_15 M1.J2_21 M1.J2_22 M1.J2_23 M1.J2_24 M1.J2_26 M1.J2_27 M1.J2_28 M1.J2_29 M1.J2_30 M1.J2_32 M1.J2_33 M1.J2_34 M1.J2_35 M1.J2_36 M1.J2_37 M1.J2_38 M1.J2_39 M1.J2_40 M1.J2_41 M1.J2_42 M1.J2_43 M1.J2_44 M1.J2_45 M1.J2_46 M1.J2_47 M1.J2_48 M1.J2_49 M1.J2_50 M1.J2_51 M1.J2_52 M1.J2_53 M1.J2_54 M1.J2_55 M1.J2_56 M1.J2_57 M1.J2_58 M1.J2_59 M1.J2_60 SD_CARD.10 SD_CARD.11 SD_CARD.12 U2.2 U2.3 U2.4 U2.5 U2.6 U2.7 U2.14 U2.15 U2.16 U2.17 U2.19 U2.21 U2.22 U2.25 U5.B1 U5.B2 U5.B3 U5.B4 U5.B5 U5.B6 U5.B7

## Text inside footprints (layer, text, board x,y; h text height)
VOUT1: Top Overlay "6" at 6570,1450 h50 r90; Top Overlay "5" at 6675,1450 h50 r90; Top Overlay "2" at 6570,1050 h50 r90; Top Overlay "1" at 6670,1070 h50 r90
VOUT2: Top Overlay "6" at 6165,1455 h50 r90; Top Overlay "5" at 6270,1455 h50 r90; Top Overlay "2" at 6170,1050 h50 r90; Top Overlay "1" at 6275,1070 h50 r90